# Altium PCB brd2.PcbDoc
Units mil, origin at the board's own origin, x right, y up, seen from the top; angles counter-clockwise.
Board outline 3500 x 2000 mil, 2 copper layers (Top Layer, Bottom Layer), stack 61.756 mil thick; 51 components, 35 nets, 157 pads, 28 vias.
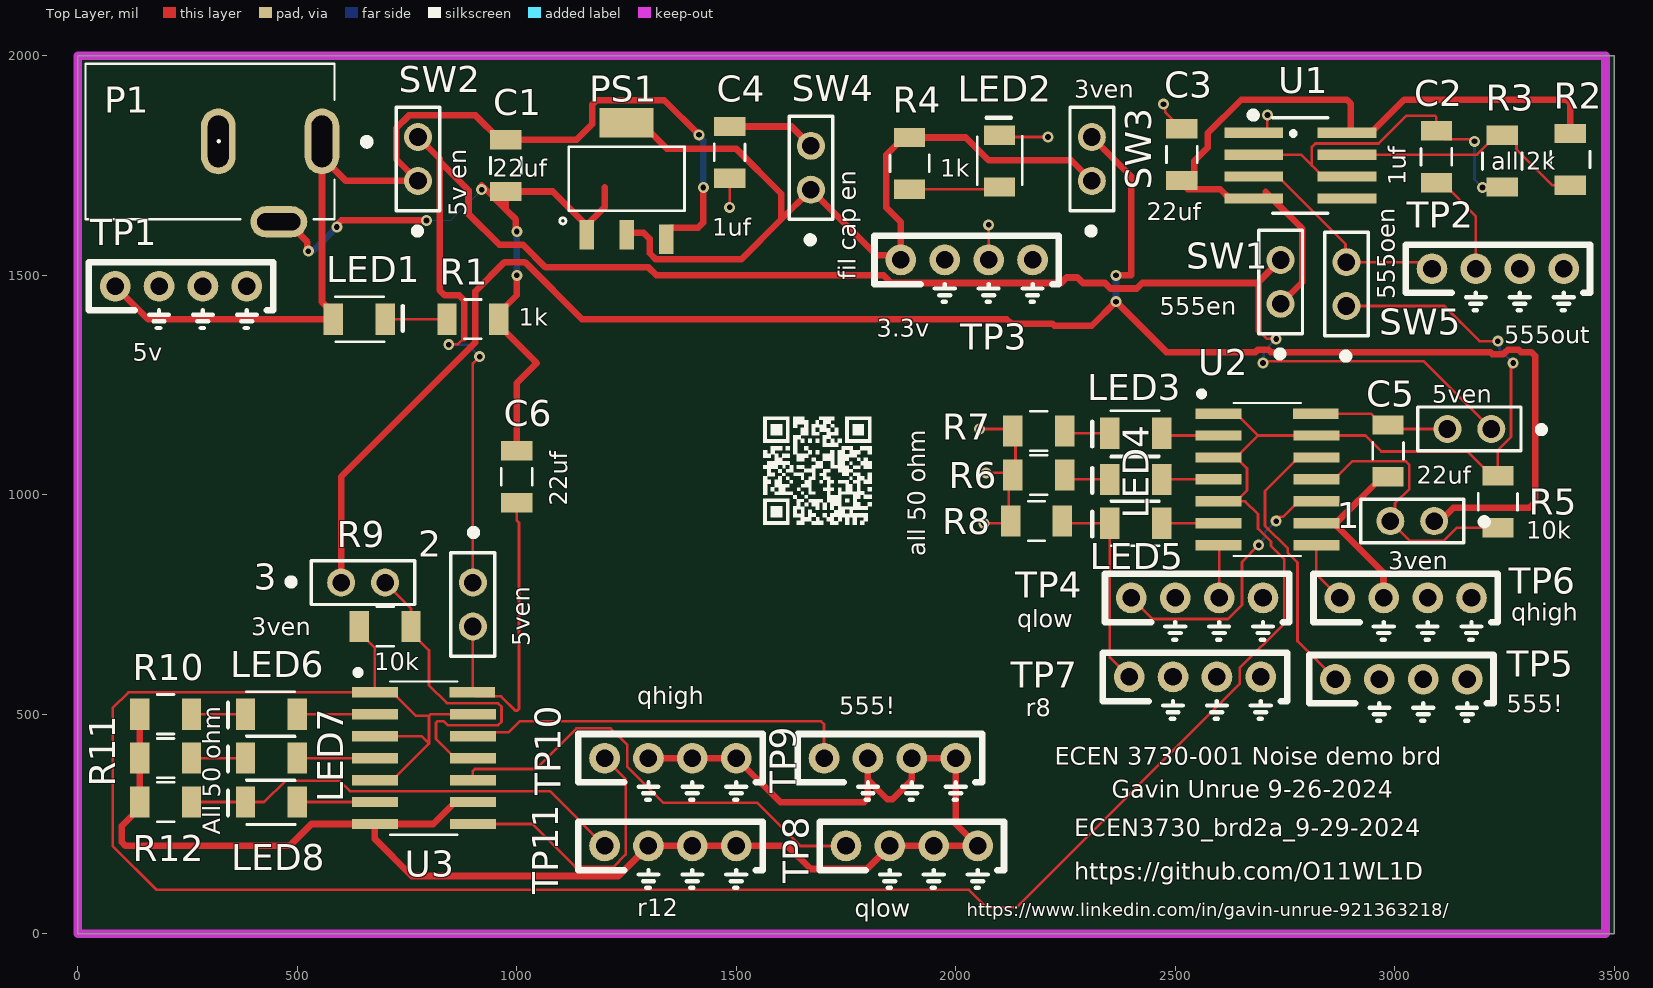
[diagram p0: Top Layer view]
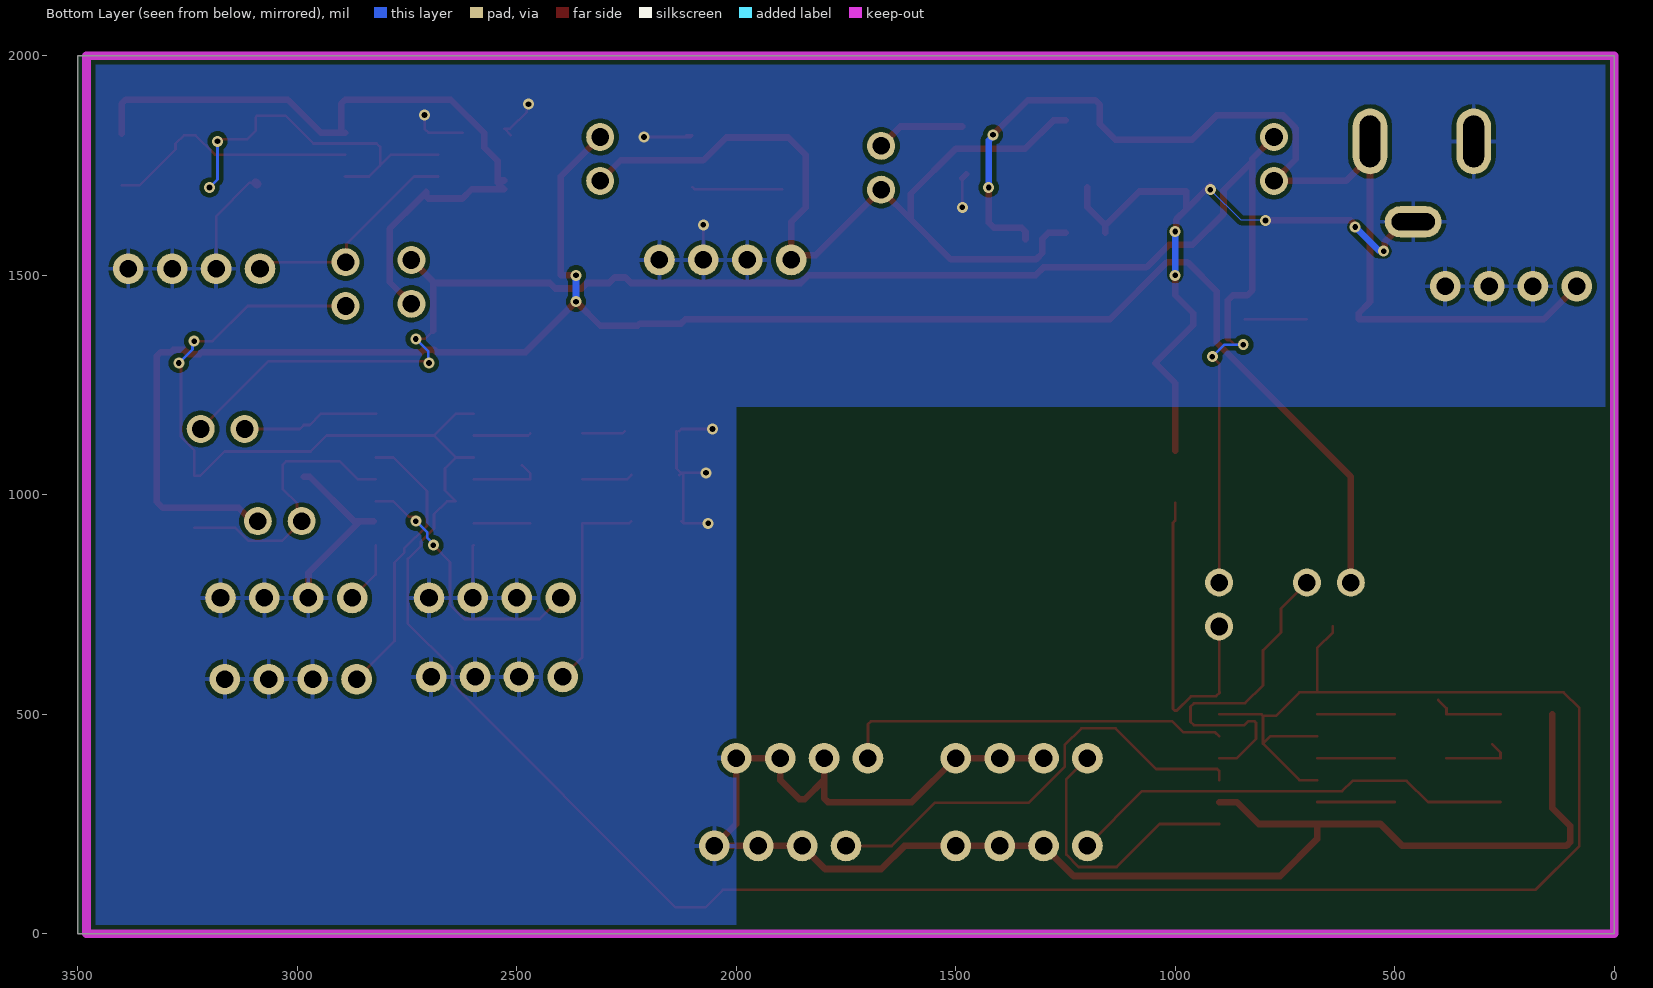
[diagram p1: Bottom Layer view, seen from below]
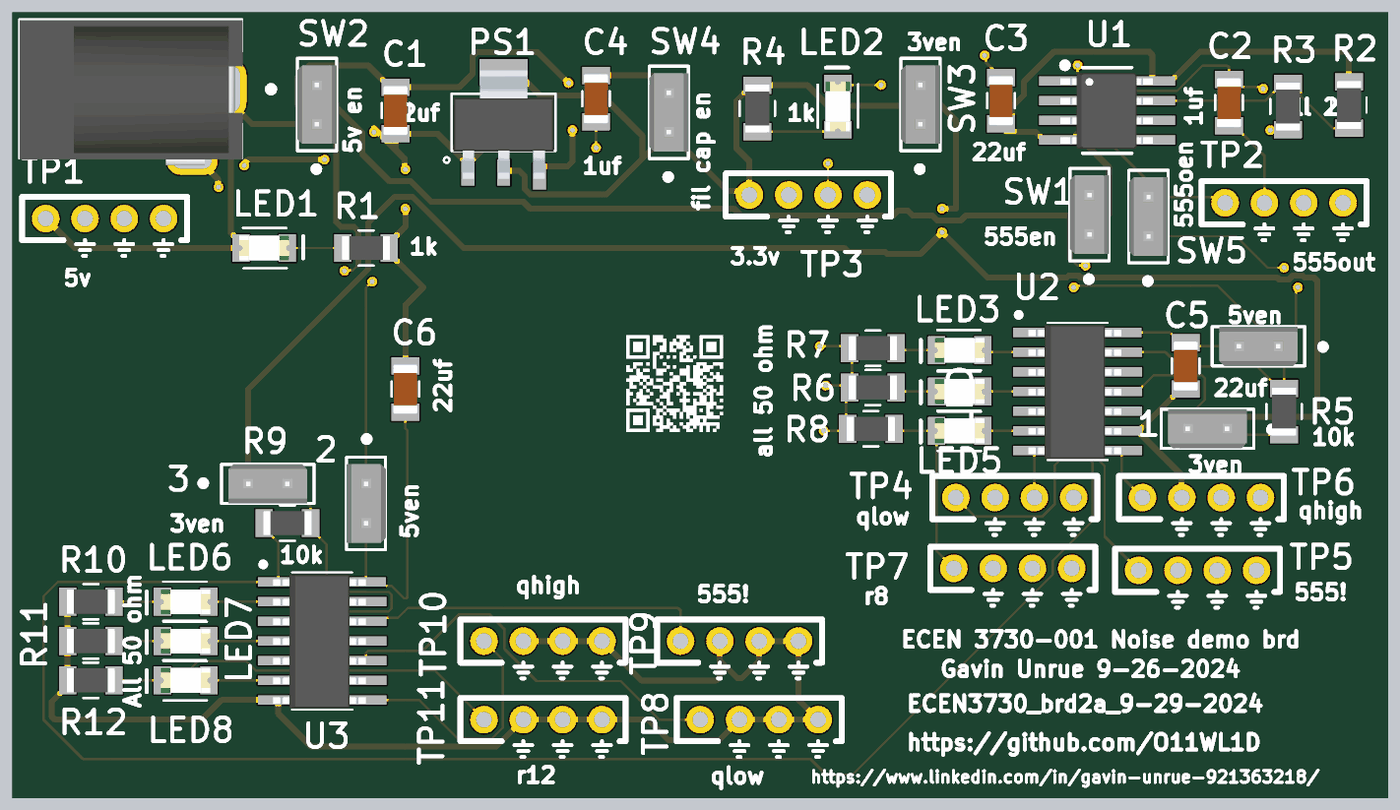
[diagram p2: 3D render of the assembled board from above, using the file's embedded part models]

## Layer stack, top to bottom
Top Solder: solder mask 1, SM-001, Dk 4
Top Layer: signal copper 1.378
Dielectric 1: core 59, Core-043, Dk 4.3
Bottom Layer: signal copper 1.378
Bottom Solder: solder mask 1, SM-001, Dk 4

## Board outline
0,0 3500,0 3500,2000 0,2000

## Design rules (kind name [scope] priority, off if disabled: settings)
BoardOutlineClearance [All] p1: gap=10 ignorepadtopadclearanceinfootprint=FALSE except(0: Arc-SplitContinuation Track-SplitContinuation SMDPad-SplitContinuation THPad-SplitContinuation Via-SplitContinuation Fill-SplitContinuation Poly-SplitContinuation Region-SplitContinuation Text-SplitContinuation)
Clearance [All] p1: gap=10 ignorepadtopadclearanceinfootprint=FALSE
PlaneClearance [All] p1: clearance=10
PlaneConnect [All] p1: planeconnectstyle=Direct reliefexpansion=20 reliefentries=4 reliefconductorwidth=10 reliefairgap=10
PolygonConnect [All] p1: thpad.connectstyle=Relief thpad.reliefconductorwidth=10 thpad.reliefentries=4 thpad.polygonreliefangle="90 Angle" thpad.airgapwidth=10 smdpad.connectstyle=Direct smdpad.reliefconductorwidth=10 smdpad.reliefentries=4 smdpad.polygonreliefangle="90 Angle" smdpad.airgapwidth=10 via.connectstyle=Direct via.reliefconductorwidth=10 via.reliefentries=4 via.polygonreliefangle="90 Angle" via.airgapwidth=10
RoutingVias [All] p1: holewidth=13 width=25 viastyle="Through Hole" minholewidth=13 minwidth=25 maxholewidth=60 maxwidth=80
SolderMaskExpansion [All] p1: expansion=4 istentingtop=FALSE
UnRoutedNet [All] p1: checkbadconnections=TRUE
Width [InNet('+5')] p1: maxlimit=100 minlimit=15 preferedwidth=20 minimp=50.000000 maximp=50.000000 favimp=50.000000
27 further rules are at their usual default settings.

## Components (designator, comment, footprint, x,y, rotation, side; value= is the part's Value field where it differs from the comment)
1 "3.3v en" 2Pin-Header-Conn 3090,940 r180 top
2 "5v enable" 2Pin-Header-Conn 900,800 r270 top
3 "3.3v en" 2Pin-Header-Conn 600,800 r0 top
C1 "22uF" 1206_Passive_Capacitor 975,1750 r90 top
C2 "1uF" 1206_Passive_Capacitor 3095,1770 r90 top
C3 "22uF" 1206_Passive_Capacitor 2515,1775 r90 top
C4 "1uF" 1206_Passive_Capacitor 1485,1780 r90 top
C5 "22uF" 1206_Passive_Capacitor 2985,1100 r90 top
C6 "22uF" 1206_Passive_Capacitor 1000,1041 r270 top
LED1 "Red" LED_1206 641,1400 r0 top
LED2 "Red" LED_1206 2100,1760 r90 top
LED3 "Red" LED_1206 2410,1140 r180 top
LED4 "Red" LED_1206 2410,1035 r180 top
LED5 "Red" LED_1206 2410,935 r180 top
LED6 "Red" LED_1206 441,500 r180 top
LED7 "Red" LED_1206 441,400 r180 top
LED8 "Red" LED_1206 441,300 r180 top
P1 "Power Jack" Power_Jack 556.22,1805 r180 top value="CONN PWR JACK 2X5.5MM SOLDER"
PS1 "AMS1117-3.3" LDO 1250,1720 r0 top value="IC REG LINEAR 3.3V 800MA SOT223"
R1 "1k" 1206_Passive_Resitor 900,1400 r180 top value="1K Ohm"
R2 "1k" 1206_Passive_Resitor 3400,1764 r90 top value="1K Ohm"
R3 "1k" 1206_Passive_Resitor 3245,1760 r90 top value="1K Ohm"
R4 "1k" 1206_Passive_Resitor 1895,1755 r90 top value="1K Ohm"
R5 "1k" 1206_Passive_Resitor 3235,984 r270 top value="10K Ohm"
R6 "" 1206_Passive_Resitor 2189,1045 r0 top value="50 Ohm"
R7 "" 1206_Passive_Resitor 2189,1145 r0 top value="50 Ohm"
R8 "" 1206_Passive_Resitor 2184,940 r0 top value="50 Ohm"
R9 "1k" 1206_Passive_Resitor 700,700 r0 top value="10K Ohm"
R10 "" 1206_Passive_Resitor 200,500 r0 top value="50 Ohm"
R11 "" 1206_Passive_Resitor 200,400 r0 top value="50 Ohm"
R12 "" 1206_Passive_Resitor 200,300 r0 top value="50 Ohm"
SW1 "555_off/on_switch" 2Pin-Header-Conn 2740,1435 r90 top
SW2 "5v power enable" 2Pin-Header-Conn 775,1715 r90 top
SW3 "3.3 powerline enable" 2Pin-Header-Conn 2310,1715 r90 top
SW4 "filter cap enable" 2Pin-Header-Conn 1670,1695 r90 top
SW5 "555_off/on_switch" 2Pin-Header-Conn 2890,1430 r90 top
TP1 "5v TP" TP10x_Probe 235,1475 r0 top
TP2 "555_out_tp" TP10x_Probe 3235,1515 r0 top
TP3 "3.3v tp" TP10x_Probe 2025,1535 r0 top
TP4 "Qlow TP" TP10x_Probe 2550,765 r0 top
TP5 "!555 TP" TP10x_Probe 3015,580 r0 top
TP6 "QHigh TP" TP10x_Probe 3025,765 r0 top
TP7 "R8 TP" TP10x_Probe 2545,585 r0 top
TP8 "Qlow TP" TP10x_Probe 1900,200 r0 top
TP9 "!555 TP" TP10x_Probe 1850,400 r0 top
TP10 "QHigh TP" TP10x_Probe 1350,400 r0 top
TP11 "R12 TP" TP10x_Probe 1350,200 r0 top
U1 "LMC555CMX/NOPB" TS555IDTTR 2785,1750 r0 top
U2 "SN74AHC14DR" HEX_74AC14 2710,1035 r0 top
U3 "SN74AHC14DR" HEX_74AC14 788.35,400 r0 top
? "5v enable" 2Pin-Header-Conn 3220,1150 r180 top

## Footprints (in the part's own frame and the unit in brackets; to place one, negate y for a bottom-side part, rotate by r counter-clockwise, add the part's x,y. Pads: shape width x height; smd on the part's side, far side on the other; paste and mask are expansions set on the pad)
2Pin-Header-Conn [mm]
  round 1.62 hole 1.02: 1(0,0) 2(2.54,0)
  silkscreen extent -3.03,-1.27 4.26,1.26, body extent -1.27,-1.27 3.81,1.27, height 8.13
1206_Passive_Capacitor [mil]
  rect 44x71 smd: 1(-59,0) 2(59,0)
  silkscreen extent -19,-35 19,35, body extent -63,-31 63,32, height 50
1206_Passive_Resitor [mil]
  rect 44x71 smd: 1(-59,0) 2(59,0)
  silkscreen extent -19,-45 19,45, body extent -61,-31 61,31, height 26
HEX_74AC14 [mm]
  rect 2.65x0.6 smd: 1(-2.836,3.81) 2(-2.836,2.54) 3(-2.836,1.27) 4(-2.836,0) 5(-2.836,-1.27) 6(-2.836,-2.54) 7(-2.836,-3.81) 8(2.836,-3.81) 9(2.836,-2.54) 10(2.836,-1.27) 11(2.836,0) 12(2.836,1.27) 13(2.836,2.54) 14(2.794,3.81)
  silkscreen extent -3.94,-4.43 1.95,5.08, body extent -3.18,-4.35 2.82,4.3, height 1.75
LDO [mm]
  rect 0.838x1.7 smd: 1(-2.311,-3.25) 2(0,-3.25) 3(2.311,-3.5)
  rect 3.099x1.7 smd: 4(0,3.25)
  silkscreen extent -3.86,-2.62 3.35,1.85, body extent -3.25,-3.65 3.25,3.35, height 1.85
LED_1206 [mil]
  rect 44x71 smd: 1(-59,0) 2(59,0)
  silkscreen extent -54,-51 99,51, body extent -63,-31 63,31, height 28
Power_Jack [mm]
  oval 2x3.8 hole 1.2 slot 3 at 90 deg: 1(0,0) 2(6,0)
  oval 3.3x1.8 hole 1 slot 2.5 at 0 deg: 3(2.5,4.65)
  silkscreen extent -2.79,-4.5 13.68,4.5, body extent -0.76,-4.45 13.64,4.95, height 11.49
TP10x_Probe [mil] "Small Probs footprint"
  round 70 hole 40: 1(-150,0) 2(-50,0) 2(50,0) 2(150,0)
  silkscreen extent -210,-95 210,55
TS555IDTTR [mm] "IC OSC Single Timer 2.7MHz 8SOIC"
  rect 3.4x0.6 smd: 1(-2.7,1.905) 2(-2.7,0.635) 3(-2.7,-0.635) 4(-2.7,-1.905) 5(2.7,-1.905) 6(2.7,-0.635) 7(2.7,0.635) 8(2.7,1.905)
  silkscreen extent -2.85,-2.77 1.6,3.05, body extent -3.03,-2.48 2.96,2.43, height 1.75

## Part data
1 2 3 SW1 SW2 SW3 SW4 SW5 ?: library part SW_2Pin_100mil_Switch, "2Pin Header", LCSC Part#=C124375, Type=Extended
C1 C3 C5 C6: library part C_22uF_1206, "22uF ±10% 25V X5R 1206 Multilayer Ceramic Capacitors MLCC - SMD/SMT RoHS", LCSC Part#=C12891, MFR Part #=CL31A226KAHNNNE, Datasheet=https://datasheet.lcsc.com/lcsc/1811031514_Samsung-Electro-Mechanics-CL31A226KAHNNNE_C12891.pdf, Type=basic
C2 C4: library part C_1uF_1206, "MULTILAYER CERAMIC CAPACITORS MLCC - SMD/SMT 1UF 50V 1206 ROHS", LCSC Part#=C1848, MFR Part #=CL31B105KBHNNNE, Digikey Link=https://www.digikey.com/product-detail/en/C1206C105M4RACTU/399-8150-1-ND/3471873/?itemSeq=304982366, Type=Basic
LED1 LED2 LED3 LED4 LED5 LED6 LED7 LED8: library part LED_RED_1206, "Red 621~631nm 1206 Light Emitting Diodes (LED) RoHS", LCSC Part#=C93133, MFR Part #=15-21/R6C-FQ1R1B/2T, Datasheet=https://datasheet.lcsc.com/szlcsc/1811151241_Everlight-Elec-15-21-R6C-FQ1R1B-2T_C93133.pdf, Type=Extended
P1: library part "P_Power Jack", "Power Barrel Connector Jack 2.10mm ID (0.083\"), 5.50mm OD (0.217\") Through Hole, Right Angle", LCSC Part#=C136744, MFR Part #=PJ-102A, Digikey Link=https://www.digikey.com/product-detail/en/PJ-102A/CP-102A-ND/275425/?itemSeq=304982367, Type=Extended
PS1: library part PS_AMS_LDO_3v3, "LOW DROPOUT REGULATORS(LDO) POSITIVE FIXED 1.3V @ 800MA 15V 3.3V 1A SOT-223 ROHS", LCSC Part#=C6186, MFR Part #=AMS1117-3.3, Type=Basic
R1 R2 R3 R4 R5 R9: library part R_1K_1206, "CHIP RESISTOR - SURFACE MOUNT 1KOHMS ±1% 1/4W 1206 ROHS", LCSC Part#=C4410, MFR Part #=RNCP1206FTD1K00CT, Digikey Link=https://www.digikey.com/product-detail/en/RNCP1206FTD1K00/RNCP1206FTD1K00CT-ND/2240675/?itemSeq=304982373, Type=Basic
R6 R7 R8 R10 R11 R12: library part R_100M_1206_1, "CHIP RESISTOR - SURFACE MOUNT 100MOHMS ±1% 1/4W 1206 ROHS", LCSC Part#=C59781, MFR Part #=1206W4F1006T5E, Digikey Link=https://www.digikey.com/en/products/detail/stackpole-electronics-inc/HMC1206JT100M/1742855, Type="Extended part"
TP1 TP2 TP3 TP4 TP5 TP6 TP7 TP8 TP9 TP10 TP11: library part TP_10x_Probe, "Test Point 300 mil centers"
U1: library part U_555_Fast, "555 Type, Timer/Oscillator _Single_ IC 3MHz 8-SO", LCSC Part#=C90760, Package=SOIC-8, Digikey Link=https://www.digikey.com/product-detail/en/texas-instruments/LMC555CMX-NOPB/LMC555CMX-NOPBCT-ND/1010550, MFR Part #=LMC555CMX/NOPB, Type=Extended
U2 U3: library part U_74AHC14, "Inverter IC 6 Channel Schmitt Trigger 14-SOIC", LCSC Part#=C6942, Datasheet=https://datasheet.lcsc.com/szlcsc/ON-Semicon-ON-74AC14SCX_C5482.pdf, MFR Part #=SN74AHC14DR, Type=Extended

## Via types
v1: diameter 25, hole 13, Top Layer to Bottom Layer, 28 vias

## Nets (pads, with @x,y where several pads share a name; then routed paths per layer and width w, separated by ;. In a path a pad name is that pad's centre, name@x,y a point inside that pad or via, vN(x,y) a via of type N, cw(c..) or ccw(c..) an arc to the next point about the centre after c; other vN are vias at no path point)
555_5v: C3.1 R2.2 SW1.1 U1.4 U1.8 | length 1709.1
  Top Layer w15: C3.1@2528.5,1716 C3.1@2542,1716 ; SW1.1 2789.39,1484.39 2789.39,1606.3 2720.69,1675 2711.14,1684.55 2705.91,1689.78 2705.91,1679.31 2701.6,1675 U1.4 2623.58,1675 2602.58,1696 2528.5,1696 2543,1710.5 2543,1759.75 2573.76,1790.51 2573.76,1823.55 2650.21,1900 2891.21,1900 2900,1891.21 2900,1829.31 U1.8@2895.69,1825 ; U1.8 U1.8@2895.69,1825 ; R2.2 3400,1891.21 3391.21,1900 3021.42,1900 2946.42,1825 U1.8@2895.69,1825
555_D: R2.1 R3.2 U1.7 | length 582.1
  Top Layer w6: U1.7 3187.5,1775 3231.5,1819 R3.2 3258.5,1819 3277.5,1800 3277.5,1786.5 3359,1705 R2.1
555_output: SW5.2 TP2.1 U1.3 | length 516
  Top Layer w6: U1.3 2733.82,1725 2887.93,1570.89 2887.93,1532.07 SW5.2 TP2.1@3070,1530
  Top Layer w15: TP2.1@3070,1530 TP2.1
+5: C1.2 LED1.1 P1.1 PS1.3 SW2.1 TP1.1 | length 2460
  Top Layer w15: TP1.1 160,1400 LED1.1 582,1413.5 556.22,1439.28 P1.1@556.22,1769.57 ; P1.1 P1.1@556.22,1769.57 ; PS1.3 1341,1599.17 1350,1608.17 1413.17,1608.17 1425,1620 v1(1425,1700) ; v1(1415,1820) 1336.08,1898.92 1181.75,1898.92 1171.5,1888.67 1171.5,1844.33 1136.17,1809 C1.2 961.5,1809 906.11,1864.39 754.54,1864.39 725.61,1835.46 725.61,1764.39 SW2.1 610.79,1715 P1.1@556.22,1769.57
  Bottom Layer w15: v1(1415,1820) 1415,1817.29 1425,1807.29 v1(1425,1700)
GND: C1.1 C2.1 C3.2 C4.1 C5.1 C6.1 LED2.2 P1.2 P1.3 PS1.1 R1.1 R6.1 R7.1 R8.1 R10.1 R11.1 R12.1 TP1.2 TP2.2 TP3.2 TP4.2 TP5.2 TP6.2 TP7.2 TP8.2 TP9.2 TP10.2 TP11.2 U1.1 U2.7 U2.9 U3.7 U3.9 | length 7218.9
  Top Layer w2: v1(920,1695) v1@920,1705
  Top Layer w6: v1(1485,1655) C4.1 ; v1(2054,1150) 2125,1150 R7.1 ; v1(2064,935) 2120,935 2123,938 R8.1 ; v1(2069,1050) 2125,1050 R6.1 ; TP3.2@2075,1535 v1(2075,1615) ; LED2.2@2113.5,1819 LED2.2 2104,1815 v1(2210,1815) ; R8.1@2121,940 2121,1045 2125.5,1049.5 2136,1060 R7.1@2136,1145 ; TP3.2@2175,1535 TP3.2@2177.5,1532.5 ; v1(2473.5,1890) 2477.14,1886.36 2477.14,1871.86 C3.2 2528.5,1834 C3.2@2513.5,1819 ; U2.7 2600,883.35 TP4.2@2600,765 ; U1.1@2623.58,1825 U1.1 2701.19,1825 2710,1833.81 v1(2710,1865) ; C2.1 3108.5,1711 3185,1634.5 3185,1515 TP2.2@3200,1500
  Top Layer w15: R10.1 R11.1 R12.1 141,286.5 100,245.5 100,208.79 108.79,200 482.25,200 532.25,250 U3.7 ; P1.3 476.92,1621.93 523.09,1575.76 523.09,1556.91 v1(525,1555) ; v1(590,1610) 590,1615 600,1625 v1(794.39,1625) ; U3.9 859.65,300 809.65,250 U3.7 ; v1@920,1705 975,1650 ; v1@997.29,1500 v1(1000,1500) 1000,1454.5 959,1413.5 R1.1 959,1386.5 1045.5,1300 1000,1254.5 C6.1 ; v1(1000,1600) 998.09,1601.91 998.09,1626.91 975,1650 ; PS1.1@1159,1597.05 PS1.1@1159,1614.01 ; 1200,1700 1200,1655.01 PS1.1@1159,1614.01 ; TP10.2@1300,400 1400,400 1500,400 1600,300 1791.21,300 1800,308.79 1800,350 ; C4.1@1476,1730 C4.1 ; TP9.2@1800,400 1800,350 ; TP8.2@2052.5,197.5 TP8.2@2050,200 ; U2.9@2825.96,939.31 U2.9@2857.7,939.31 ; TP6.2@2975,765 2974.51,765.49 2974.51,822.5 U2.9@2857.7,939.31 ; C5.1 2971.5,1041 2869.81,939.31 U2.9@2857.7,939.31 ; U3.7 676.69,215.69 760.88,131.5 1231.5,131.5 1300,200 1400,200 1500,200 1617.06,200 1669.56,147.5 1797.5,147.5 1850,200 1950,200 TP8.2@2050,200 ; 975,1650 C1.1 1082.01,1691 PS1.1@1159,1614.01 ; 1800,350 1843.79,306.21 1856.21,306.21 1900,350 1900,400 2000,400 2000,250 TP8.2@2050,200
  Top Layer w20: C2.1@3092.09,1708.09 C2.1
  Bottom Layer w2: v1(794.39,1625) 850,1625 v1(920,1695)
  Bottom Layer w15: v1(525,1555) 526.91,1556.91 536.91,1556.91 v1(590,1610) ; v1(1000,1500) v1(1000,1600)
Net1_1: 1.1 3.1 SW3.2 | length 4407.1
  Top Layer w15: 3.1 600,1041.4 905.5,1346.9 905.5,1463.36 972.14,1530 1018.4,1530 1148.4,1400 2116.21,1400 2125,1391.21 2125,1390 2220,1390 2225,1385 2310,1385 v1(2365,1440) 2480,1325 2682.57,1325 2687.57,1330 2712.43,1330 2717.43,1325 3217.57,1325 3222.57,1320 3247.43,1320 3252.43,1325 3252.57,1325 3257.57,1330 3282.43,1330 3287.43,1325 3311.21,1325 3320,1316.21 3320,983.79 3306.76,970.55 3133.75,970.55 3103.2,940 1.1 ; SW3.2 2400,1725 2400,1500 v1(2365,1500)
  Bottom Layer w15: v1(2365,1440) v1(2365,1500)
Net1_2: 1.2 R5.2 U2.11 | length 654.4
  Top Layer w6: U2.11 2862.01,1035 2903.01,1076 3025.88,1076 3033.5,1068.38 3033.5,1013.62 3000.77,980.89 3000.77,950.77 1.2 3034.89,895.11 3111.57,895.11 3141.46,925 R5.2
Net2_1: 2.1 ?.1 SW1.2 SW2.2 | length 4082.7
  Top Layer w6: v1(845,1342) 846.25,1343.25 866.5,1343.25 880.5,1357.25 ; 2.1 900,1298.99 v1(915.52,1314.48) ; 2690.61,1373.64 2708.5,1355.75 2729.25,1355.75 v1(2730,1355) ; v1(2700,1300) 2700,1300.99 2703.51,1304.5 3065.5,1304.5 ?.1
  Top Layer w15: SW2.2 824.39,1765.61 824.39,1759.36 ; 880.5,1357.25 880.5,1442.75 869.06,1454.19 835.84,1454.19 824.39,1465.64 824.39,1759.36 ; 2690.61,1373.64 2690.61,1485.61 ; SW1.2 2690.61,1485.61 ; 824.39,1759.36 890,1693.75 890,1640 960,1570 1013.75,1570 1065.75,1518 1300.14,1518 1318.14,1500 1835.75,1500 1853.25,1482.5 2240.07,1482.5 2252.57,1495 2277.43,1495 2289.93,1482.5 2340.07,1482.5 2352.57,1470 2412.43,1470 2424.93,1482.5 2687.5,1482.5 2690.61,1485.61
  Bottom Layer w6: v1(845,1342) 888,1342 v1(915.52,1314.48) ; v1(2700,1300) 2701.64,1301.64 2701.64,1326.64 v1(2730,1355)
Net2_2: 2.2 C6.2 U3.14 | length 748
  Top Layer w6: 2.2 900,551.65 U3.14 907.16,541.19 950.65,541.19 951.03,540.81 964.18,540.81 996.5,508.49 1001.47,508.49 1004.99,512 1004.99,936.01 1000,941 C6.2
Net3_2: 3.2 R9.2 U3.11 | length 791.5
  Top Layer w6: 3.2 759,741 R9.2 759,686.5 800,645.5 800,565.99 840.8,525.19 900.53,525.19 900.91,524.81 957.55,524.81 965.17,517.2 965.17,482.8 957.55,475.19 842.45,475.19 833.64,484 819.51,484 816,480.49 816,443.65 859.65,400 U3.11
Net_2: ?.2 C5.2 U2.14 | length 314.5
  Top Layer w6: U2.14 2945.5,1185 2971.5,1159 C5.2 2994,1150 ?.2
NetC2_2: C2.2 R3.1 U1.2 U1.6 | length 825.2
  Top Layer w6: U1.2 2786.18,1775 2811.37,1749.81 ; U1.6 2836.18,1725 2811.37,1749.81 ; v1@3178.2,1810 3114,1810 C2.2 3095,1860 3091.49,1863.51 3026.94,1863.51 2963.61,1800.19 2819.36,1800.19 2811.37,1792.2 2811.37,1749.81
  Bottom Layer w6: v1(3181.72,1805.28) 3181.72,1718.28 v1(3200,1700)
NetC4_2: C4.2 SW4.2 | length 203.2
  Top Layer w15: C4.2 1626,1839 SW4.2
NetLED1_2: LED1.2 R1.2 | length 141
  Top Layer w6: LED1.2 R1.2
NetLED2_1: LED2.1 R4.1 | length 207.1
  Top Layer w6: R4.1 2095,1696 LED2.1
NetLED3_1: LED3.1 U2.2 | length 131.4
  Top Layer w6: LED3.1 2474,1135 U2.2
NetLED3_2: LED3.2 R7.2 | length 99.1
  Top Layer w6: R7.2@2254,1145 2259,1140 LED3.2
NetLED4_1: LED4.1 U2.4 | length 169.7
  Top Layer w6: LED4.1@2488,1067.5 2469,1048.5 LED4.1 U2.4
NetLED4_2: LED4.2 R6.2 | length 116.1
  Top Layer w6: R6.2@2239,1045 2249,1035 LED4.2
NetLED5_1: LED5.1 U2.6 | length 129.3
  Top Layer w6: LED5.1 U2.6
NetLED5_2: LED5.2 R8.2 TP7.1 | length 482.3
  Top Layer w6: R8.2@2239,940 2244,935 LED5.2 2351,629 TP7.1
NetLED6_1: LED6.1 U3.2 | length 176.7
  Top Layer w6: LED6.1 U3.2
NetLED6_2: LED6.2 R10.2 | length 163.4
  Top Layer w6: R10.2 LED6.2 382,513.5 LED6.2@401,532.5
NetLED7_1: LED7.1 U3.4 | length 176.7
  Top Layer w6: LED7.1 U3.4
NetLED7_2: LED7.2 R11.2 | length 162.9
  Top Layer w6: R11.2@278,432 259,413 R11.2 LED7.2
NetLED8_1: LED8.1 U3.6 | length 176.7
  Top Layer w6: LED8.1 U3.6
NetLED8_2: LED8.2 R12.2 TP11.1 | length 1022.6
  Top Layer w6: R12.2 LED8.2 424.12,300 472.62,348.5 595.83,348.5 619.52,324.81 1075.19,324.81 TP11.1
NetPS1_2: PS1.2 PS1.4 R4.2 SW3.1 SW4.1 TP3.1 | length 2059.8
  Top Layer w15: PS1.2@1250,1597.05 1289,1597.05 1303.13,1582.92 1303.13,1550.37 1317.25,1536.24 1511.24,1536.24 1602.5,1627.5 ; PS1.4@1250,1852.95 1277.54,1852.95 1341.87,1788.62 1499.63,1788.62 1602.5,1685.75 1602.5,1627.5 ; SW3.1 2263.08,1761.92 2074.83,1761.92 2022.75,1814 R4.2 1881.5,1814 1842,1774.5 1842,1654.07 1875,1621.07 TP3.1 1864.48,1545.52 1819.48,1545.52 SW4.1 1602.5,1627.5
NetR5_1: R5.1 R9.1 SW5.1 U2.1 U2.3 U2.5 U2.13 U3.1 U3.3 U3.5 U3.13 | length 6683.1
  Top Layer w6: R9.1 641,686.5 676.69,650.81 U3.1 ; U3.5 717.05,350 800,432.95 ; U3.3 782.95,450 800,432.95 ; U3.13 803.51,500 800,496.49 ; U2.3 U2.3@2638.7,1085 ; U2.1 2638.7,1185 2688.7,1135 ; SW5.1 3112.88,1430 3192.88,1350 v1(3235,1350) ; v1(3270,1300) 3268.51,1300 3265,1296.49 3265,1131.52 3235,1101.52 R5.1 3221.5,1043 3166,1098.5 2969.62,1098.5 2933.12,1135 U2.13 2688.7,1135 ; U3.1 115.12,550 79.5,514.38 79.5,200.3 179.8,100 2030.44,100 2070.44,60 2137.88,60 2647,569.12 2647,604.88 2748,705.88 2748,853.67 2718.25,883.42 2718.25,893.06 2688.5,922.81 2688.5,956.01 2659.51,985 2638.7,985 2663.51,1009.81 2663.51,1060.19 U2.3@2638.7,1085 ; U3.1 717.05,550 770.56,496.49 800,496.49 ; 800,432.95 800,496.49 ; U2.3@2638.7,1085 2688.7,1135
  Bottom Layer w6: v1(3235,1350) 3238.64,1346.36 3238.64,1331.36 v1(3270,1300)
NetTP4_1: TP4.1 U2.10 | length 623.4
  Top Layer w6: TP4.1 2448,717 2619.88,717 2652,749.12 2652,847 v1(2690.12,885.12) ; v1(2730,940) 2732,942 2732,950 2746.3,950 2781.3,985 U2.10
  Bottom Layer w6: v1(2690.12,885.12) 2690.12,888.51 2703.64,902.02 2703.64,913.64 v1(2730,940)
NetTP5_1: TP5.1 U2.12 | length 643.6
  Top Layer w6: U2.12 2781.3,1085 2704.5,1008.2 2704.5,929.44 2756.49,877.45 2756.49,867.8 2778.63,845.67 2778.63,666.37 TP5.1
NetTP6_1: TP6.1 U2.8 | length 142.1
  Top Layer w6: U2.8 2821.65,818.35 TP6.1
NetTP8_1: TP8.1 U3.10 | length 1051.1
  Top Layer w6: U3.10 900,370.81 904.38,375.19 1043.32,375.19 1136.13,468 1213.63,468 1252,429.63 1252,380.12 1333.94,298.18 1547.87,298.18 1646.06,200 TP8.1
NetTP9_1: TP9.1 U3.12 | length 894.2
  Top Layer w6: U3.12 908.81,458.81 981.44,458.81 1006.63,484 1693.37,484 1700,477.37 TP9.1
NetTP10_1: TP10.1 U3.8 | length 640
  Top Layer w6: U3.8 1035.52,250 1133.52,152 1219.88,152 1248,180.12 1248,352 TP10.1
pads on no net: U1.5

## Polygon pours and split planes (outlines as drawn)
GND on Bottom Layer "GND_L02_P000" (solid, pour order 0): 0,2000 3500,2000 3500,0 0,0

## Keep-outs
Keep-Out Layer:
  lines w20: 0,0 0,2000 3480,2000 3480,0 0,0

## Other copper
Bottom Layer:
  pour cut-out: 0,1200 2000,1200 2000,0 0,0

## Silkscreen, mask and mechanical layers (free items; w line width, h text height)
Top Overlay:
  drawing of 15 lines, arcs and shapes, not listed
  text "3ven" at 2270,1905 h40
  text "all 2k" at 3220,1740 h40
  text "22uf" at 945,1725 h40
  text "1k" at 1965,1725 h40
  text "1uf" at 3025,1705 h40 r90
  text "5v en" at 885,1635 h40 r90
  text "22uf" at 2435,1625 h40
  text "1uf" at 1445,1590 h40
  text "fil cap en" at 1771.67,1490 h40 r90
  text "555oen" at 3000,1445 h40 r90
  text "555en" at 2465,1410 h40
  text "1k" at 1005,1385 h40
  text "3.3v" at 1820,1360 h40
  text "555out" at 3250,1345 h40
  text "5v" at 125,1305 h40
  text "5ven" at 3085,1210 h40
  text "22uf" at 3050,1025 h40
  text "22uf" at 1115,975 h40 r90
  text "10k" at 3300,900 h40
  text "all 50 ohm" at 1930,860 h40 r90
  text "3ven" at 2985,830 h40
  text "qhigh" at 3265,713.33 h40
  text "qlow" at 2140,698.33 h40
  text "3ven" at 395,680 h40
  text "5ven" at 1030,655 h40 r90
  text "10k" at 675,600 h40
  text "qhigh" at 1275,523.33 h40
  text "555!" at 3255,505 h40
  text "555!" at 1735,500 h40
  text "r8" at 2160,495 h40
  text "ECEN 3730-001 Noise demo brd" at 2225,385 h40
  text "Gavin Unrue 9-26-2024" at 2355,310 h40
  text "All 50 ohm" at 325,225 h40 r90
  text "ECEN3730_brd2a_9-29-2024" at 2270,221.66 h40
  text "https://github.com/O11WL1D" at 2270,123.33 h40
  text "r12" at 1275,40 h40
  text "https://www.linkedin.com/in/gavin-unrue-921363218/" at 2025,40 h30
  text "qlow" at 1770,38.33 h40